# EAGLE board blinky555 (EAGLE 5.06)
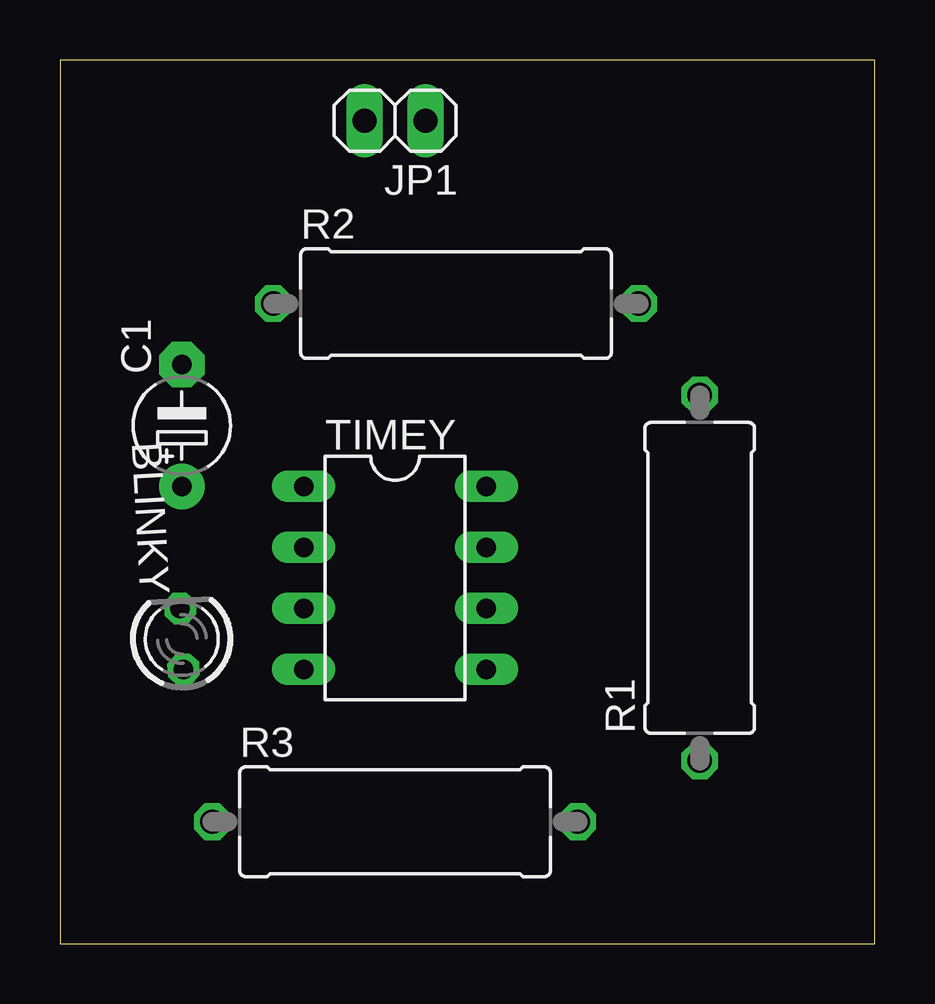
[diagram p0: board, top side]
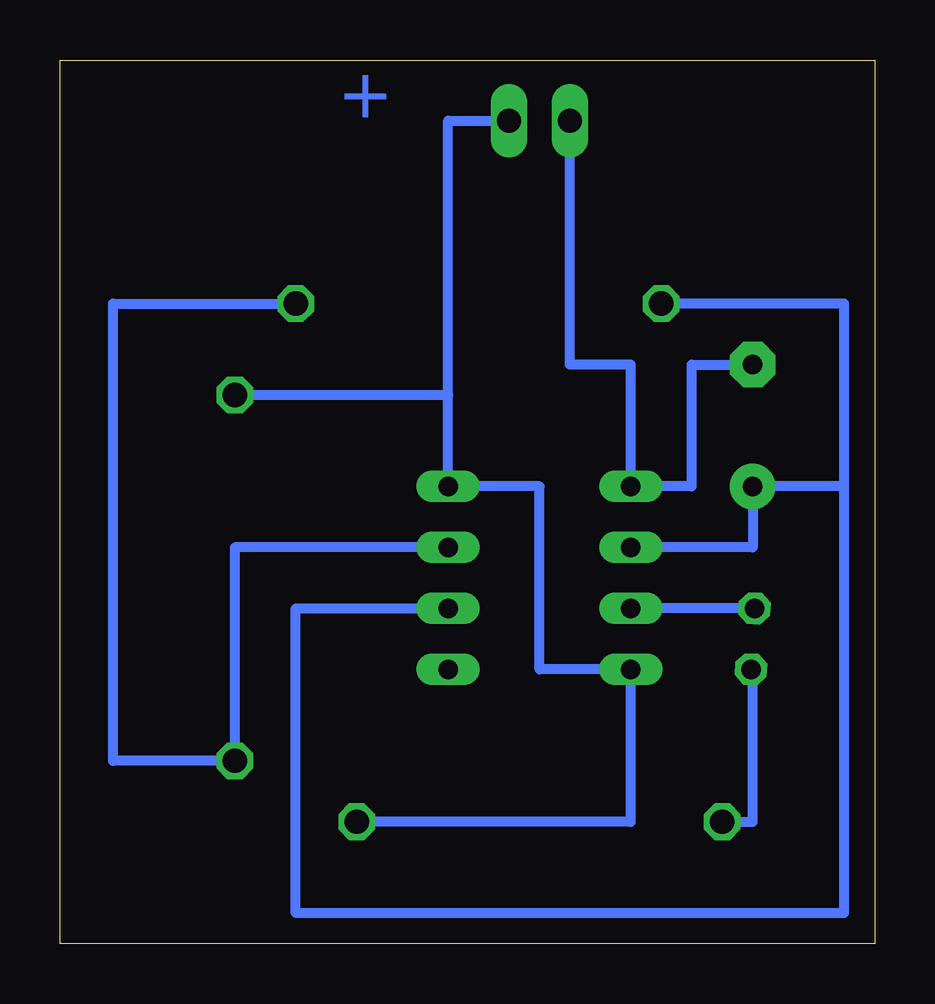
[diagram p1: board, bottom side, seen from below]

Size 33.96 x 36.82 mm. Coordinates in mm from the lower left corner, seen from the top.
Outline: 0,0 33.96,0 33.96,36.82 0,36.82 0,0
Copper layers (1*16): Top 0.035mm / dielectric 1.5mm / Bottom 0.035mm
Design rules "default *": minimum track width 10mil, minimum drill 24mil, track to track 32mil, track to pad 32mil, pad to pad 32mil, via to via 32mil, smd to smd 8mil, copper to edge 40mil, drill to drill 8mil, minimum pad ring 10mil, minimum via ring 8mil, stop-mask expansion 4mil, vias tented up to drill 0mil, thermal gap 10mil

## Footprints (pad centres in the part's own frame; a part is rotated, then mirrored left to right if it is on the bottom)
LED3MM = drill 0.813 octagon: A -1.27,0; K 1.27,0
E5-4 = drill 0.813 pad 1.905 round: + -2.54,0 | drill 0.813 pad 1.905 octagon: - 2.54,0
1X02 = drill 1.016 long: 1 -1.27,0; 2 1.27,0
P0613/15 = drill 1.016 octagon: 1 -7.62,0; 2 7.62,0
DIL-08 = drill 0.813 long: 1 -3.81,-3.81; 2 -1.27,-3.81; 3 1.27,-3.81; 4 3.81,-3.81; 5 3.81,3.81; 6 1.27,3.81; 7 -1.27,3.81; 8 -3.81,3.81

## Placement (x,y rotation side)
BLINKY  [LED3MM]  5.08,12.7 93.2 top
C1  10uF  [E5-4]  5.08,21.59 90 top
JP1  [1X02]  13.97,34.29 180 top
R1  4.7K  [P0613/15]  26.67,15.24 90 top
R2  10K  [P0613/15]  16.51,26.67 0 top
R3  1K  [P0613/15]  13.97,5.08 0 top
TIMEY  NE555  [DIL-08]  13.97,15.24 270 top

## Library data of the parts
BLINKY = led
C1 R1-R3 = resistor
JP1 = pinhead
TIMEY = st-microelectronics

## Nets
GND: C1.- JP1.2 TIMEY.1
N$1: R1.1 R2.2 TIMEY.7
N$2: C1.+ R2.1 TIMEY.2 TIMEY.6
N$6: BLINKY.K TIMEY.3
N$7: BLINKY.A R3.1
VCC: JP1.1 R1.2 R3.2 TIMEY.4 TIMEY.8

## Tracks (layer width: path | path; a pad name or v marks a point on that pad's centre or on a via)
GND
  Bottom 0.406: C1.- 7.62,24.13 7.62,19.05 TIMEY.1 10.16,24.13 12.7,24.13 JP1.2
N$1
  Bottom 0.406: R2.2 31.75,26.67 31.75,7.62 R1.1 26.67,16.51 TIMEY.7
N$2
  Bottom 0.406: TIMEY.6 24.13,13.97 24.13,1.27 1.27,1.27 1.27,19.05 | 1.27,19.05 C1.+ 5.08,16.51 TIMEY.2 | R2.1 1.27,26.67 1.27,19.05
N$6
  Bottom 0.406: TIMEY.3 BLINKY.K
N$7
  Bottom 0.406: BLINKY.A 5.08,11.43 5.08,5.08 R3.1
VCC
  Bottom 0.406: 17.78,22.86 R1.2 | 17.78,22.86 TIMEY.8 13.97,19.05 13.97,11.43 TIMEY.4 10.16,5.08 R3.2 | JP1.1 17.78,34.29 17.78,22.86

## Text on the board
Bottom: +